# Altium PCB LED20-A1.PcbDoc
Units mm, origin at the board's own origin, x right, y up, seen from the top; angles counter-clockwise.
Board outline 69 x 44.5 mm, 2 copper layers (Top Layer, Bottom Layer); 79 components, 77 nets, 280 pads, 131 vias.
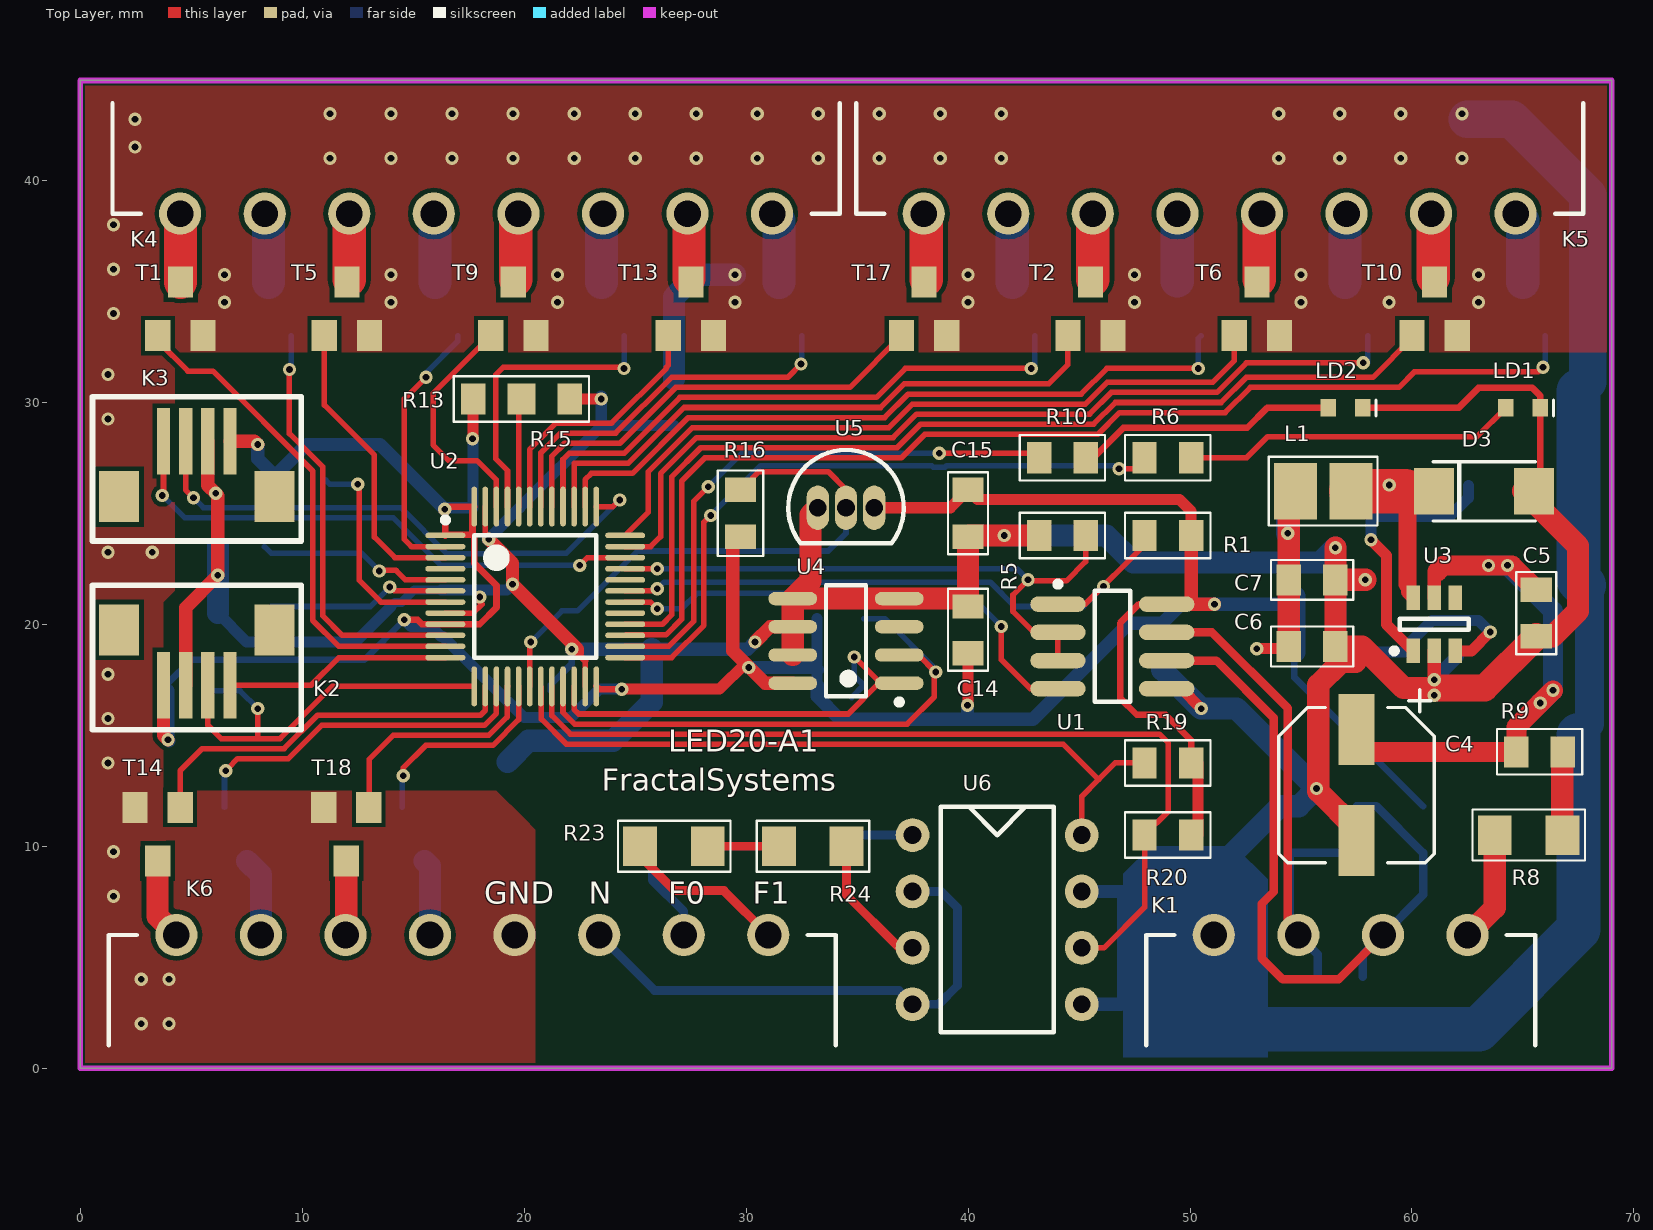
[diagram p0: Top Layer view]
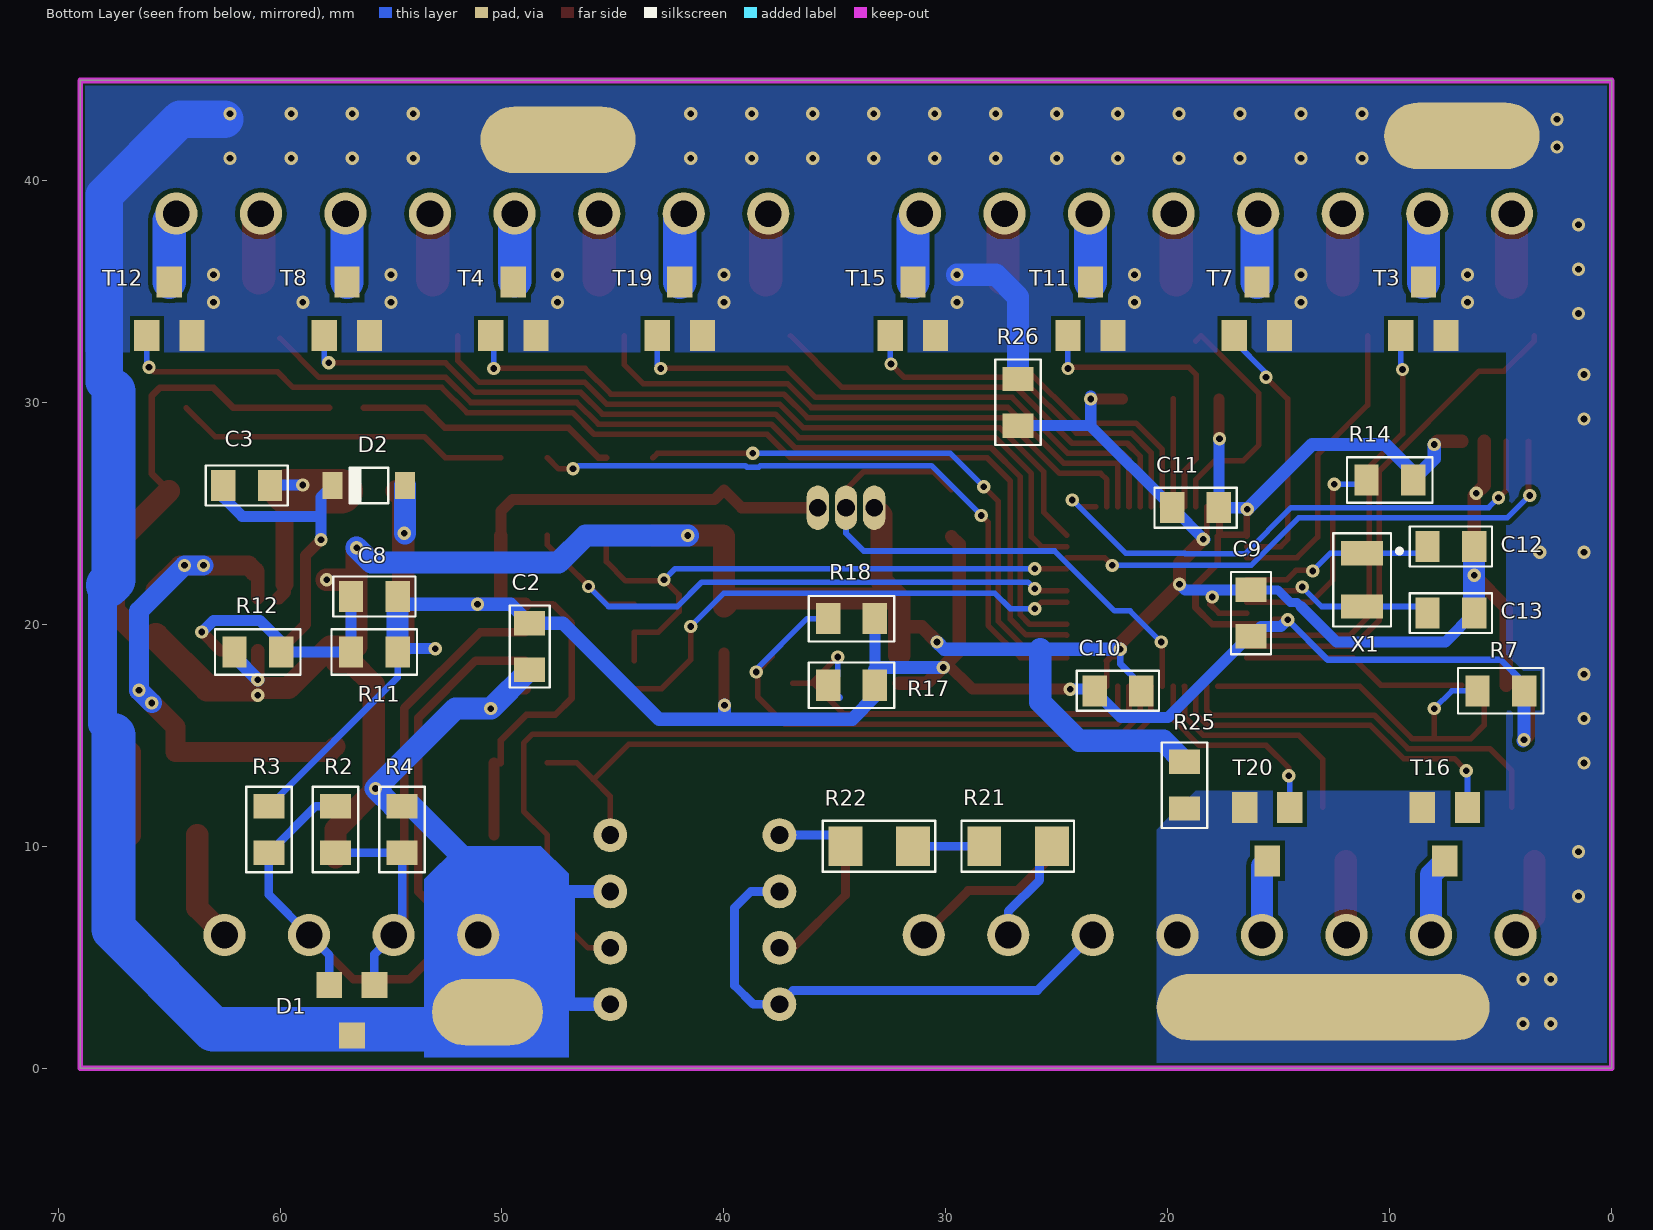
[diagram p1: Bottom Layer view, seen from below]

## Layer stack, top to bottom
Top Solder: solder mask 0.0102, Solder Resist, Dk 3.5
Top Layer: signal copper 0.0356
Dielectric 1: dielectric 0.32, FR-4, Dk 4.8
Bottom Layer: signal copper 0.0356
Bottom Solder: solder mask 0.0102, Solder Resist, Dk 3.5

## Board outline
0,0 69,0 69,44.5 0,44.5

## Design rules (kind name [scope] priority, off if disabled: settings)
Clearance ClearanceEdge [All vs OnLayer('Keep-Out Layer')] p1: gap=0.102
Clearance [All] p2: gap=0.203
DiffPairsRouting [All] p1: maxlimit=0.254 minlimit=0.254 mostfreqgap=0.254 toplayer_minwidth=0.381 toplayer_maxwidth=0.381 toplayer_prefwidth=0.381 bottomlayer_minwidth=0.381 bottomlayer_maxwidth=0.381 bottomlayer_prefwidth=0.381 maxuncoupledlength=12.7
HoleSize [All] p1: absolutevalues=TRUE maxlimit=6 minlimit=0.3 maxpercent=80.000 minpercent=20.000
HoleToHoleClearance [All] p1: gap=0.127 allowstackedmicrovias=TRUE
MinimumAnnularRing [All] p1: minimumring=0.13
MinimumSolderMaskSliver SilkscreenOverComponentPads [All] p2: minsoldermaskwidth=0.254
PolygonConnect [All] p1: connectstyle=Direct reliefconductorwidth=0.254 reliefentries=4 polygonreliefangle="90 Angle" airgapwidth=0.254
RoutingVias [All] p1: holewidth=0.3 width=0.6 viastyle="Through Hole" minholewidth=0.3 minwidth=0.6 maxholewidth=0.5 maxwidth=1
SilkToSilkClearance [All] p1: silktosilkclearance=0.15
SilkToSolderMaskClearance [IsPad] p1: minsilkscreentomaskgap=0.15 clearancetoexposedcopper=TRUE
SolderMaskExpansion [All] p1: expansion=0.1
UnpouredPolygon [All] p1: allowunpoured=FALSE
Width [All] p1: maxlimit=12.7 minlimit=0.203 preferedwidth=0.254
24 further rules are at their usual default settings.

## Classes and differential pairs
component class LED20-A1-P01: C2 C3 C4 C5 C6 C7 C8 C9 C10 C11 C12 C13 C14 C15 D1 D2 D3 K1 K2 K3 L1 LD1 LD2 R1 R2 R3 R4 R5 R6 R7 R8 R9 R10 R11 R12 R13 R14 R15 R16 R17 R18 R25 R26 U1 U2 U3 U4 U5 X1
component class LED20-A1-P02: K4 K5 K6 R19 R20 R21 R22 R23 R24 T1 T2 T3 T4 T5 T6 T7 T8 T9 T10 T11 T12 T13 T14 T15 T16 T17 T18 T19 T20 U6
differential pair RS485: +RS485_P -RS485_N

## Components (designator, comment, footprint, x,y, rotation, side; value= is the part's Value field where it differs from the comment)
C2 "1u" CC0805-1 48.75,19 r90 bottom
C3 "100n" CC0805-1 61.5,26.25 r0 bottom
C4 "10u" CAPPS-D6.3X7.7 57.5,12.75 r270 top
C5 "1u" CC0805-1 65.6,20.5 r90 top
C6 "10u" CC0805-1 55.5,19 r180 top
C7 "10u" CC0805-1 55.5,22 r180 top
C8 "DNI" CC0805-1 55.75,21.25 r180 bottom
C9 "100n" CC0805-1 16.25,20.5 r270 bottom
C10 "100n" CC0805-1 22.25,17 r0 bottom
C11 "100n" CC0805-1 18.75,25.25 r180 bottom
C12 "20p" CC0805-1 7.25,23.5 r0 bottom
C13 "20p" CC0805-1 7.25,20.5 r0 bottom
C14 "100n" CC0805-1 40,19.75 r270 top
C15 "100n" CC0805-1 40,25 r90 top
D1 "PESD12VL2BT" SOT-23_NUP2105L(Primary) 55.75,3.75 r270 bottom
D2 "1N4148" SOD-123 56,26.25 r180 bottom
D3 "SS110B" DO-214AC 63.25,26 r180 top
K1 "Terminal Block Connector, 3.81mm, Right Angle" CONN_3.81_4 62.5,6 r180 top
K2 "BM04B-SRSS-TB" JST-SH-4pin 5.25,19.75 r0 top locked
K3 "BM04B-SRSS-TB" JST-SH-4pin 5.25,25.75 r180 top
K4 "Terminal Block Connector, 3.81mm, Right Angle" CONN_3.81_8 4.5,38.5 r0 top
K5 "Terminal Block Connector, 3.81mm, Right Angle" CONN_3.81_8 38,38.5 r0 top
K6 "Terminal Block Connector, 3.81mm, Right Angle" CONN_3.81_8 31,6 r180 top
L1 "10uH" IND-LQH32CN4R7M33l 56,26 r180 top
LD1 "GREEN" LEDGREENC190 65,29.75 r180 top
LD2 "YELLOW" LEDYELLOWC190 57,29.75 r180 top
R1 "10K" RC0805-1 49,24 r0 top
R2 "DNI" RC0805-1 57.5,10.75 r270 bottom
R3 "47K" RC0805-1 60.5,10.75 r90 bottom
R4 "47K" RC0805-1 54.5,10.75 r270 bottom
R5 "10K" RC0805-1 44.25,24 r0 top
R6 "470R" RC0805-1 49,27.5 r0 top
R7 "10K" RC0805-1 5,17 r0 bottom
R8 "FUSE" RC1206-1 65.25,10.5 r0 top
R9 "10R" RC0805-1 65.75,14.25 r0 top
R10 "470R" RC0805-1 44.25,27.5 r0 top
R11 "31K6" RC0805-1 55.75,18.75 r180 bottom
R12 "10K" RC0805-1 61,18.75 r180 bottom
R13 "DNI" RC0805-1 18.75,30.15 r180 top
R14 "10K" RC0805-1 10,26.5 r0 bottom
R15 "10K" RC0805-1 21,30.15 r0 top
R16 "10K" RC0805-1 29.75,25 r90 top
R17 "10K" RC0805-1 34.25,17.25 r0 bottom
R18 "10K" RC0805-1 34.25,20.25 r0 bottom
R19 "10K" RC0805-1 49,13.75 r180 top
R20 "10K" RC0805-1 49,10.5 r180 top
R21 "120K" RC1206-1 26.75,10 r0 bottom
R22 "120K" RC1206-1 33,10 r0 bottom
R23 "120K" RC1206-1 26.75,10 r0 top
R24 "120K" RC1206-1 33,10 r0 top
R25 "0R" RC0805-1 19.25,12.75 r270 bottom
R26 "0R" RC0805-1 26.75,30 r270 bottom
T1 "PMV40UN" SOT-23 3.5,33 r90 top
T2 "PMV40UN" SOT-23 44.5,33 r90 top
T3 "PMV40UN" SOT-23 9.5,33 r90 bottom
T4 "PMV40UN" SOT-23 50.5,33 r90 bottom
T5 "PMV40UN" SOT-23 11,33 r90 top
T6 "PMV40UN" SOT-23 52,33 r90 top
T7 "PMV40UN" SOT-23 17,33 r90 bottom
T8 "PMV40UN" SOT-23 58,33 r90 bottom
T9 "PMV40UN" SOT-23 18.5,33 r90 top
T10 "PMV40UN" SOT-23 60,33 r90 top
T11 "PMV40UN" SOT-23 24.5,33 r90 bottom
T12 "PMV40UN" SOT-23 66,33 r90 bottom
T13 "PMV40UN" SOT-23 26.5,33 r90 top
T14 "PMV40UN" SOT-23 4.5,11.75 r270 top
T15 "PMV40UN" SOT-23 32.5,33 r90 bottom
T16 "PMV40UN" SOT-23 6.5,11.75 r270 bottom
T17 "PMV40UN" SOT-23 37,33 r90 top
T18 "PMV40UN" SOT-23 13,11.75 r270 top
T19 "PMV40UN" SOT-23 43,33 r90 bottom
T20 "PMV40UN" SOT-23 14.5,11.75 r270 bottom
U1 "SN65HVD08P" M08A_M 46.5,19 r0 top
U2 "STM32F030C8T6" STM-LQFP48_N 20.5,21.25 r0 top locked
U3 "MCP16331T-E/CH" MCHP-SOT-23-CH6_N 61,20 r90 top
U4 "LM75AIM" M08A_N 34.5,19.25 r180 top
U5 "DS18B20" TO92 34.5,25.25 r270 top
U6 "TLP620" DIP8 37.5,10.5 r0 top locked
X1 "8MHz" OSCCC150X320X9-2N 11.25,22 r270 bottom

## Footprints (in the part's own frame and the unit in brackets; to place one, negate y for a bottom-side part, rotate by r counter-clockwise, add the part's x,y. Pads: shape width x height; smd on the part's side, far side on the other; paste and mask are expansions set on the pad)
CAPPS-D6.3X7.7 [mm] "Capacitor polarised SMD D6.3; 6.6x6.6x7.7mm"
  rect 3.2x1.6 smd: 1(-2.5,0) 2(2.5,0)
  silkscreen extent -4.3,-3.5 3.5,3.5, body extent -3.3,-3.3 3.3,3.3, height 7.71
CC0805-1 [mm] "Chip capacitor  0805"
  rect 1.1x1.4 smd: 1(-1.05,0) 2(1.05,0)
  silkscreen extent -1.85,-0.9 1.85,0.9, body extent -1,-0.63 1,0.63, height 1
CONN_3.81_4 [mm]
  round 1.9 hole 1.2: 1(0,0) 2(3.81,0) 3(7.62,0) 4(11.43,0)
  silkscreen extent -3.05,0 14.48,0
CONN_3.81_8 [mm]
  round 1.9 hole 1.2: 1(0,0) 2(3.81,0) 3(7.62,0) 4(11.43,0) 5(15.24,0) 6(19.05,0) 7(22.86,0) 8(26.67,0)
  silkscreen extent -3.05,0 29.72,0
DIP8 [mil]
  round 60 hole 31.5: 1(0,0) 2(0,-100) 3(0,-200) 4(0,-300) 5(300,-300) 6(300,-200) 7(300,-100) 8(300,0)
  silkscreen extent 50,-350 250,50
DO-214AC [mm]
  rect 1.8x2.1 smd: A(-2.25,0) K(2.25,0)
  silkscreen extent -2.3,-1.33 2.3,1.35, body extent -2.3,-1.43 2.3,1.5, height 2.61
IND-LQH32CN4R7M33l [mm] "Inductor,Molded Body;3.20mm L X 2.50mm W X 2.20mm H"
  rect 1.95x2.55 smd: 1(-1.25,0) 2(1.25,0)
  silkscreen extent -2.45,-1.55 2.45,1.55, body extent -1.63,-1.28 1.63,1.28, height 2.2
JST-SH-4pin [mm]
  rect 1.8x2.3 smd: 0(3.5,0) ""(-3.5,0)
  rect 0.6x3 smd: 1(-1.5,-2.5) 2(-0.5,-2.5) 3(0.5,-2.5) 4(1.5,-2.5)
  silkscreen extent -4.7,-4.5 4.7,2
LEDGREENC190 [mm] "LED chip C190 1.6x0.8x0.8mm vertical"
  rect 0.7x0.8 smd: 1(-0.775,0) 2(0.775,0)
  silkscreen extent -1.38,-0.35 -1.38,0.35, body extent -0.8,-0.4 0.8,0.4, height 0.8
LEDYELLOWC190 [mm] "LED chip C190 1.6x0.8x0.8mm vertical"
  rect 0.7x0.8 smd: 1(-0.775,0) 2(0.775,0)
  silkscreen extent -1.38,-0.35 -1.38,0.35, body extent -0.8,-0.4 0.8,0.4, height 0.8
M08A_M [mm] "SOIC, 8-Leads, Body 4.9x3.9mm, Pitch 1.27mm, IPC Low Density"
  oval 2.5x0.7 smd: 1(-2.45,1.905) 2(-2.45,0.635) 3(-2.45,-0.635) 4(-2.45,-1.905) 5(2.45,-1.905) 6(2.45,-0.635) 7(2.45,0.635) 8(2.45,1.905)
  silkscreen extent -2.57,-2.5 0.8,2.93, body extent -2,-2.5 2,2.5, height 1.75
M08A_N [mm] "SOIC, 8-Leads, Body 4.9x3.9mm, Pitch 1.27mm, IPC Medium Density"
  oval 2.2x0.6 smd: 1(-2.4,1.905) 2(-2.4,0.635) 3(-2.4,-0.635) 4(-2.4,-1.905) 5(2.4,-1.905) 6(2.4,-0.635) 7(2.4,0.635) 8(2.4,1.905)
  silkscreen extent -2.53,-2.5 0.9,2.88, body extent -2,-2.5 2,2.5, height 1.75
MCHP-SOT-23-CH6_N [mm] "SOT23, 6-Leads, Body 2.9x1.55mm, Pitch 0.95mm, IPC Medium Density"
  rect 1.1x0.6 smd: 1(-1.2,0.95) 2(-1.2,0) 3(-1.2,-0.95) 4(1.2,-0.95) 5(1.2,0) 6(1.2,0.95)
  silkscreen extent -1.32,-1.55 0.25,1.92, body extent -0.9,-1.55 0.9,1.55, height 1.45
OSCCC150X320X9-2N [mm] "Oscillator, 1.5mm X 3.2m X 0.9mm"
  rect 1.1x1.9 smd mask+0.051: 1(-1.2,0) 2(1.2,0)
  silkscreen extent -2.1,-1.3 2.1,1.78, body extent -1.6,-0.8 1.5,0.8, height 2.5
RC0805-1 [mm] "Chip resistor 0805"
  rect 1.1x1.4 smd: 1(-1.05,0) 2(1.05,0)
  silkscreen extent -1.92,-1.02 1.92,1.02, body extent -1.02,-0.64 1.02,0.64, height 0.51
RC1206-1 [mil] "Chip resistor 1206"
  rect 60x70 smd: 1(-60,0) 2(60,0)
  silkscreen extent -99,-45 100,45, body extent -60,-30 60,30, height 22
SOD-123 [mm]
  rect 0.91x1.22 smd: 1(-1.637,0) 2(1.637,0)
  silkscreen extent -0.87,-0.8 0.87,0.8, body extent -1.93,-0.85 1.92,0.85, height 1.42
SOT-23 [mil]
  rect 55x45 smd: 1(0,0) 2(0,-80) 3(95,-40)
SOT-23_NUP2105L(Primary) [mil]
  rect 46x46 smd: A(0,0) b(0,-80) k(90,-40)
STM-LQFP48_N [mm] "QFP, 48-Leads, Body 7x7mm, Pitch 0.5mm, IPC Medium Density"
  oval 1.8x0.25 smd: 1(-4.05,2.75) 2(-4.05,2.25) 3(-4.05,1.75) 4(-4.05,1.25) 5(-4.05,0.75) 6(-4.05,0.25) 7(-4.05,-0.25) 8(-4.05,-0.75) 9(-4.05,-1.25) 10(-4.05,-1.75) 11(-4.05,-2.25) 12(-4.05,-2.75) 25(4.05,-2.75) 26(4.05,-2.25) 27(4.05,-1.75) 28(4.05,-1.25) 29(4.05,-0.75) 30(4.05,-0.25) 31(4.05,0.25) 32(4.05,0.75) 33(4.05,1.25) 34(4.05,1.75) 35(4.05,2.25) 36(4.05,2.75)
  oval 0.25x1.8 smd: 13(-2.75,-4.05) 14(-2.25,-4.05) 15(-1.75,-4.05) 16(-1.25,-4.05) 17(-0.75,-4.05) 18(-0.25,-4.05) 19(0.25,-4.05) 20(0.75,-4.05) 21(1.25,-4.05) 22(1.75,-4.05) 23(2.25,-4.05) 24(2.75,-4.05) 37(2.75,4.05) 38(2.25,4.05) 39(1.75,4.05) 40(1.25,4.05) 41(0.75,4.05) 42(0.25,4.05) 43(-0.25,4.05) 44(-0.75,4.05) 45(-1.25,4.05) 46(-1.75,4.05) 47(-2.25,4.05) 48(-2.75,4.05)
  silkscreen extent -4.17,-2.75 2.75,3.57, body extent -3.5,-3.5 3.5,3.5, height 1.6
TO92 [mm] "TO92"
  oval 2x1 hole 0.8: 1(0,-1.27) 2(0,0) 3(0,1.27)
  silkscreen extent -2.6,-2.6 1.6,2.6, body extent -2.61,-2.61 1.6,2.61, height 5.33

## Part data
C2 C3 C5 C8: library part CAPCC0805_1U50VX7R, "Capacitor chip ceramic 0805"
C4: library part CAPPS100U25VFP, "Capacitor electrolitic SMD 6.3X6.3X7.7MM low ESR"
C6 C7: library part CAPCC0805_10U16VX5R, "Capacitor chip ceramic 0805"
C9 C10 C11 C12 C13 C14 C15: library part CAPCC0805_100N50VX7R, "Capacitor chip ceramic 0805"
D1: library part NUP2105L, "Diode"
D2: library part D-1N4148WS, "Small Signal Diode"
D3: library part CD214A-B240LF-0.3V@1A, "Schottky Diode"
K1: library part CONN_TB_3.81_4PIN, "Terminal Block Connector, 3.81mm, 4pin"
K2 K3: library part JST-SH-BM04B-SRSS-TB, "JST connector 4pin vertical"
K4 K5 K6: library part CONN_TB_3.81_8PIN, "Terminal Block Connector, 3.81mm, 8pin"
L1: library part LQH44PN100MP0L, "Chip Inductor 4 x 4 mm"
LD1: library part LED-GREEN0603V, "LED green HSMG vertical"
LD2: library part LED-YELLOW0603V, "LED yellow HSMY vertical"
R1 R2 R3 R4 R5 R6 R7 R9 R10 R11 R12 R13 R14 R15 R16 R17 R18 R19 R20 R25 R26: library part RES0805, "Chip Resistor 0805"
R8 R21 R22 R23 R24: library part RES1206, "Chip Resistor 1206"
U1: "3.3 / 5 V RS-485 Transceiver, 10 Mbps, Half Duplex, -40 to 85 degC, 8-pin PDIP (P), Pb-Free (RoHS)"
U2: "ARM Cortex-M0 32-bit MCU, 64 KB Flash, 8 KB Internal RAM, 39 I/Os, 48-pin LQFP, -40 to 85 degC, Tray"
U3: library part MCP16301T-E/CH, "High-Voltage Input Integrated Switch Step-Down Regulator, 600 mA, Input Voltage 4.0 to 30 V, Output Voltage 2.0 to 15 V, -40 to 125 degC, 6-pin SOT-23 (CH6), Tape and Reel"
U4: "Digital Temperature Sensor and Thermal Watchdog with Two-Wire Interface, 8-pin Narrow SOIC"
U5 U6: "digital temperature sensor"
X1: library part XTAL-SMD_8MHz, "SMD Crystal 8MHz"

## Free pads (board coordinates)
  oval 7x3 smd far side: 0(6.75,42) 0(47.475,41.825)
  oval 15x3 smd far side: 0(13,2.75)
  oval 5x3 smd far side: 0(50.65,2.525)

## Via types
v1: diameter 0.6, hole 0.3, Top Layer to Bottom Layer, tented both sides, 130 vias
v2: diameter 0.6, hole 0.3, Top Layer to Bottom Layer, 1 vias

## Nets (pads, with @x,y where several pads share a name; then routed paths per layer and width w, separated by ;. In a path a pad name is that pad's centre, name@x,y a point inside that pad or via, vN(x,y) a via of type N, cw(c..) or ccw(c..) an arc to the next point about the centre after c; other vN are vias at no path point)
+3V3: C2.2 C6.2 C7.2 C8.2 C9.2 C10.2 C11.2 C14.2 C15.2 D2.2 K2.1 K3.1 L1.2 R1.2 R3.2 R7.1 R11.2 R13.2 R14.1 R16.1 R17.1 R18.1 R19.1 R20.1 U1.8 U2.1 U2.9 U2.24 U2.48 U4.8 U5.3 | length 170.7
  Top Layer w0.3: v1(14.6,20.2) 15.2,20.2 15.4,20 U2.9 18,20 18.753,20.753 18.753,21.747 17.747,22.753 17.747,23.953 17.675,24.025 ; U2.1 U2.1@16.45,24.003 ; U2.48 U2.48@17.747,25.3 ; U2.24 23.375,17.075 v1@24.35,17.075 ; U1.8 47.705,20.905 46.85,20.05 46.85,16.675 47.6,15.925 48.9,15.925 50.05,14.775 R19.1 ; U2.1@16.45,24.003 16.45,25.15 v1(16.425,25.175) 16.55,25.3 U2.48@17.747,25.3 ; U2.1@16.45,24.003 16.472,24.025 17.675,24.025 ; 17.675,24.025 17.675,25.228 U2.48@17.747,25.3
  Top Layer w0.5: v1(17.675,28.35) 17.7,28.375 R13.2 ; v1(24.4,17.075) 28.8,17.075 v1@29.963,18.237 ; U5.3 39.2,25.25 C15.2 40.425,25.625 49.525,25.625 50.05,25.1 R1.2 ; v1@39.975,16.425 40,16.4 C14.2 ; R20.1@50.35,10.5 R19.1@50.35,13.75 ; v2(53,18.9) 54.35,18.9 C6.2
  Top Layer w0.6: K2.1 3.75,15 v1(3.95,14.8) ; K3.1 7.85,28.25 v1(8,28.1) ; R16.1 29.4,23.6 29.4,18.8 29.963,18.237 30.855,17.345 U4.8 ; U1.8 U1.8@49.905,20.905 ; R1.2 50.05,21.05 U1.8@49.905,20.905 ; v1(51.1,20.9) 51.095,20.905 U1.8@49.905,20.905
  Top Layer w1: C6.2 54.45,25.7 L1.2
  Bottom Layer w0.3: R7.1@3.95,17.35 5,18.4 12.8,18.4 v1(14.6,20.2) ; R11.2 54.7,17.6 R3.2
  Bottom Layer w0.5: v1(14.6,20.2) 14.9,19.9 15.8,19.9 C9.2 16.35,19.45 20,15.8 22.1,15.8 C10.2 23.375,17.075 v1(24.4,17.075) ; v1(16.425,25.175) 16.5,25.25 C11.2 v1@17.7,28.375 ; R17.1 33.2,17.95 R18.1 ; v2(53,18.9) 54.55,18.9 R11.2
  Bottom Layer w0.6: R7.1 v1(3.95,14.8) v1@4,14.75 ; v1(8,28.1) 8,27.45 R14.1 8.95,26.85 10.2,28.1 13.5,28.1 v1(16.425,25.175) ; v1(30.125,18.05) 33.1,18.05 33.2,17.95 ; R17.1 33.2,16.75 34.225,15.725 39.975,15.725 ; v1(39.975,16.35) 39.975,15.725 ; C8.2 54.35,20.9 v1(51.1,20.9) 49.6,20.9 C2.2 47.25,20.05 42.925,15.725 39.975,15.725
  Bottom Layer w1: v1@54.362,24.1 D2.2 ; R11.2 C8.2
  other v1: 54.4,24.1
+VCC: K1.1 R8.1 | length 5
  Top Layer w1: K1.1 63.726,7.226 R8.1
GND: C2.1 C4.2 C5.1 C6.1 C7.1 C9.1 C10.1 C11.1 C12.1 C13.1 C14.1 C15.1 D1.k D3.A K1.4 K2.2 K3.2 K6.4 LD1.1 LD2.1 pad.0 R4.1 R5.1 R12.1 R15.2 R25.1 R25.2 R26.1 R26.2 T1.2 T2.2 T3.2 T4.2 T5.2 T6.2 T7.2 T8.2 T9.2 T10.2 T11.2 T12.2 T13.2 T14.2 T15.2 T16.2 T17.2 T18.2 T19.2 T20.2 U1.5 U2.8 U2.23 U2.47 U3.2 U4.4 U4.5 U4.6 U4.7 U5.1 U6.5 U6.7 | length 274.1
  Top Layer w0.25: U2.8 17.7,20.5 18.1,20.9 18,21 v1(18,21.225) ; v1@18.25,23.9 U2.47 ; U2.23 22.75,18.35
  Top Layer w0.3: v1@18.25,23.9 18.324,23.826 v1@18.326,23.826 ; v1(22.15,18.875) 22.225,18.875 22.387,18.713 22.75,18.35 ; LD2.1 62.1,29.75 63,30.65 65.425,30.65 65.775,30.3 LD1.1 65.775,26.775 D3.A@65,26
  Top Layer w0.5: R15.2 v1(23.475,30.15) ; U1.5 49.605,17.095 v1(50.5,16.2)
  Top Layer w0.6: K2.2 4.75,20.75 v1(6.2,22.2) 6.2,25.8 v1(6.1,25.9) 5.75,26.25 K3.2 ; v1(18.4,23.826) 19.475,22.751 v1(19.475,21.8) 22.387,18.888 v1@22.387,18.713 ; v1(30.4,19.2) 31.085,19.885 U4.6 ; U3.2 v1(61,17.5) 61,17.25 61.125,17.125
  Top Layer w1: U4.7 U4.6 U4.5 ; U5.1 32.9,24.92 32.9,21.955 U4.5 ; R5.1 40.05,24 C15.1 C14.1 39.645,21.155 U4.4 U4.5 ; v1(56.55,23.45) C7.1 ; 57.45,18.3 56.8,18.3 55.774,17.274 55.774,12.476 57.5,10.75 C4.2@57.5,9.5 ; v1(57.9,22) C7.1 ; 61.125,17.125 59.625,17.125 57.75,19 C6.1 C7.1 ; D3.A@65,26 67.475,23.525 67.475,20.6 66.325,19.45 C5.1
  Top Layer w1.2: 61.125,17.125 63.275,17.125 C5.1
  Bottom Layer w0.3: C10.1 21.2,17.275 22.15,18.225 v1(22.15,18.875) ; pad.0@50.65,2.525 51.336,1.839 D1.k@56.766,1.839
  Bottom Layer w0.4: 14,20.8 14.172,20.972 14.472,20.972 15.05,21.55 C9.1
  Bottom Layer w0.5: C13.1 7.5,19.2 12.4,19.2 14,20.8 ; C9.1 17.85,21.55 ; v1(18,21.225) 18,21.4 17.85,21.55 ; v1@18.326,23.826 18.326,23.824 18.35,23.8 C11.1 23.475,28.925 ; v1(19.475,21.8) 19.225,21.55 17.85,21.55 ; v1@23.475,30.275 v1(23.475,30.15) 23.475,28.925 ; R26.2 23.5,28.95 23.475,28.925
  Bottom Layer w0.6: v1(22.15,18.875) 25.75,18.875 30.075,18.875 v1(30.4,19.2) ; U6.5 46.88,2.88 47,3 47,7.96 U6.7 ; 47.05,5.95 47.1,6 K1.4 ; v1(61,17.5) 62.05,18.55 R12.1
  Bottom Layer w1: C13.1 v1(6.2,22.2) C12.1 ; R25.1 20.2,14.75 24,14.75 25.75,16.5 25.75,18.875 ; R26.1 26.75,34.75 27.75,35.75 v1(29.5,35.75) ; v1(41.625,24) 46.225,24 47.45,22.775 55.875,22.775 v1(56.55,23.45) ; C2.1 v1(50.5,16.2) 52.1,16.2 v1(55.7,12.6) 54.9,11.8 R4.1 54.05,11.8 51.5,9.25
  Bottom Layer w1.3: 67.5,15 68,15.5 68,21.5 67.75,21.75
  Bottom Layer w1.7: 62.5,42.75 64.5,42.75 67.921,39.329 67.921,30.921 67.5,30.5
  Bottom Layer w2: K1.4 50.65,5.58 50.65,2.525 52.314,2.525 53.089,1.75 63,1.75 67.5,6.25 67.5,15 ; 67.5,30.5 67.5,22 67.75,21.75
  other v1: 2.75,2 4,2 2.75,4 4,4 1.5,7.75 1.5,9.75 1.25,13.75 1.25,15.75 61,16.8 1.25,17.75 1.25,23.25 3.25,23.25 1.25,29.25 1.25,31.25 1.5,34 6.5,34.5 14,34.5 21.5,34.5 29.5,34.5 40,34.5 47.5,34.5 55,34.5 58.968,34.5 63,34.5 6.5,35.75 14,35.75 21.5,35.75 40,35.75 47.5,35.75 55,35.75 63,35.75 1.5,36 1.5,38 11.25,41 14,41 16.75,41 19.5,41 22.25,41 25,41 27.75,41 30.5,41 33.25,41 36,41 38.75,41 41.5,41 54,41 56.75,41 59.5,41 62.25,41 2.468,41.5 2.468,42.75 11.25,43 14,43 16.75,43 19.5,43 22.25,43 25,43 27.75,43 30.5,43 33.25,43 36,43 38.75,43 41.5,43 54,43 56.75,43 59.5,43 62.25,43
I2C_CLK: R18.2 U2.21 U4.2 | length 25
  Top Layer w0.25: U2.21 21.75,16.025 22.272,15.503 37.253,15.503 38.475,16.725 38.475,17.9 U4.2@37.825,18.55
  Bottom Layer w0.25: R18.2 36.25,20.25 38.55,17.95 v1(38.55,17.85)
I2C_DAT: R17.2 U2.22 U4.1 | length 20.2
  Top Layer w0.25: U2.22 22.25,16.166 22.46,15.956 34.6,15.956 35.989,17.345 U4.1@36.055,17.345 ; v1(34.875,18.525) U4.1@36.055,17.345 ; U4.1 U4.1@36.055,17.345
  Bottom Layer w0.25: 34.75,16.7 R17.2 34.875,17.675 v1(34.875,18.525)
IN0: K6.2 R21.1 | length 4.8
  Bottom Layer w0.4: R21.1 25.775,9.451 25.775,8.475 27.19,7.06 K6.2
IN1: K6.1 R23.1 | length 7.7
  Top Layer w0.4: R23.1 25.226,9.549 26.775,8 29,8 K6.1
INP0: R19.2 U2.19 U6.8 | length 32.9
  Top Layer w0.25: U2.19 20.772,17.178 20.772,15.721 21.896,14.597 44.278,14.597 45.875,13 ; U6.8 45.12,12.245 45.875,13 ; R19.2 46.625,13.75 45.875,13
INP1: R20.2 U2.20 U6.6 | length 41
  Top Layer w0.25: U2.20 21.25,15.884 22.084,15.05 48.625,15.05 49.025,14.65 49.025,11.575 R20.2 47.95,7.25 46.12,5.42 U6.6
LED1: R6.1 U2.25 | length 29.9
  Top Layer w0.25: U2.25 26.648,18.5 28.1,19.952 28.1,24.6 v1(28.4,24.9) ; v1(46.8,27) 47.45,27 R6.1
  Bottom Layer w0.25: v1(28.4,24.9) 30.65,27.15 38.362,27.15 38.44,27.072 38.96,27.072 39.038,27.15 46.55,27.15 v1@46.7,27
LED2: R10.1 U2.26 | length 25.5
  Top Layer w0.25: U2.26 26.507,19 27.647,20.14 27.647,25.547 v1(28.3,26.2) ; v1(38.7,27.7) 43,27.7 R10.1
  Bottom Layer w0.25: v1(28.3,26.2) 29.8,27.7 v1(38.7,27.7)
N: K6.3 U6.2 U6.4 | length 23.6
  Bottom Layer w0.4: K6.3 25.88,3.5 36.88,3.5 U6.4 38.68,2.88 39.525,3.725 39.525,7.225 38.79,7.96 U6.2
NetC3_1: C3.1 D3.K L1.1 U3.6 | length 9.7
  Top Layer w0.6: 59.8,21.8 59.8,21.45 U3.6
  Top Layer w0.8: 59.7,26 D3.K@60.1,25.6 ; 59.8,21.8 59.8,25.3 D3.K@60.1,25.6 ; D3.K@60.5,26 D3.K@60.1,25.6
  Top Layer w2: L1.1 59.7,26
  Bottom Layer w0.5: v1(58.975,26.275) 60.425,26.275 C3.1
NetC3_2: C3.2 D2.1 U3.1 | length 13.7
  Top Layer w0.5: v1@58.175,23.775 58.853,23.097 58.853,19.997 U3.1
  Bottom Layer w0.5: D2.1 58.15,25.737 58.15,24.85 ; v1(58.15,23.8) 58.15,24.85 ; C3.2 62.55,25.7 61.7,24.85 58.15,24.85
NetC4_1: C4.1 C5.2 R9.1 U3.5 | length 25.2
  Top Layer w0.6: U3.5 61,22.225 61.15,22.375
  Top Layer w0.9: C4.1@57.5,14.5 57.75,14.25 R9.1 64.7,15.375 v1(65.775,16.45) v1(66.35,17.025) ; 61.15,22.375 61.425,22.65 v1(63.45,22.65) v1(64.3,22.65) 64.5,22.65 C5.2
  Bottom Layer w0.9: v1(63.45,22.65) v1(64.3,22.65) 66.35,20.6 v1(66.35,17.025) v1(65.775,16.45)
NetC8_1: C8.1 R11.1 R12.2 U3.3 | length 12.2
  Top Layer w0.5: U3.3 62.675,18.8 v1(63.525,19.65)
  Bottom Layer w0.5: C8.1 R11.1 R12.2 59.95,19.225 60.9,20.175 63,20.175 v1(63.525,19.65)
NetC12_2: C12.2 U2.5 X1.1 | length 8.7
  Top Layer w0.25: v1@13.525,22.425 14.225,22.425 14.65,22 U2.5
  Bottom Layer w0.25: C12.2 8.6,23.2 X1.1 12.675,23.2 v1(13.475,22.4)
NetC13_2: C13.2 U2.6 X1.2 | length 8.7
  Top Layer w0.25: v1@13.975,21.675 14.15,21.5 U2.6
  Bottom Layer w0.25: C13.2 8.6,20.8 X1.2 13.075,20.8 v1(13.95,21.675)
NetLD1_2: LD1.2 R6.2 | length 15.1
  Top Layer w0.25: R6.2 52.55,27.5 53.5,28.45 62.925,28.45 LD1.2
NetLD2_2: LD2.2 R10.2 | length 11.9
  Top Layer w0.3: R10.2 45.65,27.5 47,28.85 52.575,28.85 53.475,29.75 LD2.2
NetR8_2: R8.2 R9.2 | length 3.8
  Top Layer w1: R8.2 66.774,14.224 R9.2
NetR13_1: R13.1 R15.1 U2.44 | length 4.9
  Top Layer w0.25: U2.44 R13.1@19.75,30.15
NetR14_2: R14.2 U2.7 | length 10.1
  Top Layer w0.25: v1@12.575,26.275 12.575,21.975 13.55,21 U2.7
  Bottom Layer w0.25: R14.2 11.25,26.3 v1(12.5,26.3)
NetR21_2: R21.2 R22.1 | length 3.2
  Bottom Layer w0.4: R21.2 R22.1
NetR22_2: R22.2 U6.1 | length 3.2
  Bottom Layer w0.4: R22.2 35.024,10.5 U6.1
NetR23_2: R23.2 R24.1 | length 3.2
  Top Layer w0.4: R23.2 R24.1
NetR24_2: R24.2 U6.3 | length 6.2
  Top Layer w0.4: R24.2 34.524,7.801 36.905,5.42 U6.3
ONEW: R16.2 U2.18 U5.2 | length 25.6
  Top Layer w0.25: U2.18 20.25,19.15 v1(20.3,19.2) ; R16.2 30.575,26.875 33.7,26.875 34.5,26.075 U5.2
  Bottom Layer w0.25: v1(20.3,19.2) 21.7,20.6 22.4,20.6 25.1,23.3 33.7,23.3 34.5,24.1 U5.2
OUT0: K4.1 T1.3 | length 3.1
  Top Layer w1: K4.1 K4.1@4.516,38.484
  Top Layer w1.5: T1.3 K4.1@4.516,38.484
OUT1: K4.2 T3.3 | length 3.2
  Bottom Layer w1: K4.2 K4.2@8.484,38.326
  Bottom Layer w1.5: T3.3 K4.2@8.484,38.326
OUT2: K4.3 T5.3 | length 3.1
  Top Layer w1: T5.3 T5.3@12.12,35.517
  Top Layer w1.5: T5.3@12.12,35.517 K4.3
OUT3: K4.4 T7.3 | length 3.1
  Bottom Layer w1: K4.4 K4.4@15.984,38.446
  Bottom Layer w1.5: T7.3 K4.4@15.984,38.446
OUT4: K4.5 T9.3 | length 3
  Top Layer w1.5: T9.3@19.62,35.517 K4.5@19.62,38.5
OUT5: K4.6 T11.3 | length 3.1
  Bottom Layer w1: K4.6@23.484,38.434 K4.6
  Bottom Layer w1.5: T11.3 K4.6@23.484,38.434
OUT6: K4.7 T13.3 | length 3
  Top Layer w1.5: T13.3@27.429,35.579 K4.7@27.429,38.562
OUT7: K4.8 T15.3 | length 3.2
  Bottom Layer w1: K4.8 K4.8@31.484,38.186
  Bottom Layer w1.5: T15.3 K4.8@31.484,38.186
OUT8: K5.1 T17.3 | length 3
  Top Layer w1.5: T17.3@38.12,35.517 K5.1@38.12,38.5
OUT9: K5.2 T19.3 | length 3.2
  Bottom Layer w1: K5.2 K5.2@41.984,38.326
  Bottom Layer w1.5: T19.3 K5.2@41.984,38.326
OUT10: K5.3 T2.3 | length 3
  Top Layer w1.5: T2.3@45.62,35.517 K5.3
OUT11: K5.4 T4.3 | length 3.1
  Bottom Layer w1: T4.3@49.43,35.467 T4.3
  Bottom Layer w1.5: T4.3@49.43,35.467 K5.4
OUT12: K5.5 T6.3 | length 3
  Top Layer w1.5: T6.3@53.12,35.517 K5.5@53.12,38.5
OUT13: K5.6 T8.3 | length 3.1
  Bottom Layer w1: K5.6@56.984,38.434 K5.6
  Bottom Layer w1.5: T8.3 K5.6@56.984,38.434
OUT14: K5.7 T10.3 | length 3
  Top Layer w1.5: T10.3@60.954,35.604 K5.7@60.954,38.587
OUT15: K5.8 T12.3 | length 3.2
  Bottom Layer w1: K5.8 K5.8@64.984,38.186
  Bottom Layer w1.5: T12.3 K5.8@64.984,38.186
OUT16: K6.8 T14.3 | length 3.7
  Top Layer w1: T14.3 3.484,6.846 K6.8
OUT17: K6.7 T16.3 | length 3.6
  Bottom Layer w1: T16.3 8.14,8.713 K6.7
OUT18: K6.6 T18.3 | length 3.4
  Top Layer w1: K6.6 11.984,6.034 T18.3
OUT19: K6.5 T20.3 | length 3.4
  Bottom Layer w1: T20.3 15.76,9.093 K6.5
OUT_GATE_0: T1.1 U2.11 | length 22.8
  Top Layer w0.25: T1.1 3.5,32.75 4.85,31.4 5.975,31.4 10.475,26.9 10.475,20.175 11.65,19 U2.11
OUT_GATE_1: T3.1 U2.10 | length 19.2
  Top Layer w0.25: v1(9.425,31.475) 9.425,28.591 10.928,27.088 10.928,20.375 11.803,19.5 U2.10
  Bottom Layer w0.25: v1(9.425,31.475) 9.5,31.55 T3.1
OUT_GATE_2: T5.1 U2.3 | length 13.6
  Top Layer w0.25: T5.1 11,29.875 13.25,27.625 13.25,23.925 14.175,23 U2.3
OUT_GATE_3: T7.1 U2.2 | length 12.2
  Top Layer w0.25: v1(15.575,31.125) 14.6,30.15 14.6,23.825 14.925,23.5 U2.2
  Bottom Layer w0.25: v1(15.575,31.125) 15.575,31.325 17,32.75 T7.1
OUT_GATE_4: T9.1 U2.46 | length 11.1
  Top Layer w0.25: U2.46 18.75,26.5 17.875,27.375 16.6,27.375 15.9,28.075 15.9,30.4 T9.1 T9.1@18.75,32.75
OUT_GATE_5: T11.1 U2.45 | length 13.6
  Top Layer w0.25: U2.45 19.25,26.925 18.725,27.45 18.725,31.25 19.05,31.575 24.45,31.575 v1(24.5,31.525)
  Bottom Layer w0.25: v1(24.5,31.525) T11.1
OUT_GATE_6: T13.1 U2.43 | length 11.7
  Top Layer w0.25: U2.43 20.25,27.866 21.444,29.06 23.935,29.06 26.403,31.528 26.403,31.578 26.5,31.675 T13.1
OUT_GATE_7: T15.1 U2.42 | length 17.1
  Top Layer w0.25: U2.42 20.75,27.725 21.631,28.606 24.125,28.606 26.643,31.125 31.875,31.125 v1(32.475,31.725)
  Bottom Layer w0.25: v1(32.475,31.725) 32.5,31.75 T15.1
OUT_GATE_8: T17.1 U2.41 | length 20.3
  Top Layer w0.25: U2.41 21.25,27.575 21.828,28.153 24.312,28.153 26.831,30.672 34.672,30.672 T17.1
OUT_GATE_9: T19.1 U2.40 | length 26.5
  Top Layer w0.25: U2.40 21.75,27.425 22.025,27.7 24.5,27.7 27.019,30.219 35.869,30.219 37.175,31.525 v1(42.85,31.525) v1@42.875,31.55
  Bottom Layer w0.25: v1(42.85,31.525) 43,31.675 T19.1
OUT_GATE_10: T2.1 U2.39 | length 27.3
  Top Layer w0.25: U2.39 22.25,27.247 24.688,27.247 27.206,29.765 36.056,29.765 37.116,30.825 43.625,30.825 44.5,31.7 T2.1
OUT_GATE_11: T4.1 U2.38 | length 32.4
  Top Layer w0.25: U2.38 22.75,26.519 23.025,26.794 24.875,26.794 27.394,29.312 36.244,29.312 37.304,30.372 45.097,30.372 46.25,31.525 v1(50.375,31.525)
  Bottom Layer w0.25: v1(50.375,31.525) 50.375,32.875 T4.1
OUT_GATE_12: T6.1 U2.36 | length 32.9
  Top Layer w0.25: U2.36 25.6,25.05 25.6,26.877 27.582,28.859 36.432,28.859 37.491,29.919 45.285,29.919 46.263,30.897 51.022,30.897 52,31.875 T6.1
OUT_GATE_13: T8.1 U2.35 | length 39.8
  Top Layer w0.25: U2.35 25.7,23.5 26.15,23.95 26.15,26.786 27.769,28.406 36.619,28.406 37.679,29.465 45.472,29.465 46.45,30.444 51.21,30.444 52.541,31.775 v1(57.8,31.775)
  Bottom Layer w0.25: v1(57.8,31.775) 58,31.775 T8.1
OUT_GATE_14: T10.1 U2.28 | length 44.4
  Top Layer w0.25: U2.28 26.225,20 26.647,20.422 26.647,26.642 27.957,27.953 36.807,27.953 37.867,29.012 45.66,29.012 46.638,29.99 51.397,29.99 52.532,31.125 58.238,31.125 T10.1@60,32.887
OUT_GATE_15: T12.1 U2.27 | length 51.5
  Top Layer w0.25: U2.27 24.572,19.522 26.388,19.522 27.1,20.234 27.1,26.454 28.145,27.499 36.995,27.499 38.055,28.559 45.848,28.559 46.826,29.537 51.585,29.537 52.72,30.672 59.406,30.672 60.109,31.375 65.7,31.375 v1(65.9,31.575)
  Bottom Layer w0.25: v1(65.9,31.575) 66,31.675 T12.1
OUT_GATE_16: T14.1 U2.14 | length 17.6
  Top Layer w0.25: T14.1 4.5,13.4 5.497,14.397 9.188,14.397 10.691,15.9 18.025,15.9 18.25,16.125 U2.14
OUT_GATE_17: T16.1 U2.15 | length 16
  Top Layer w0.25: v1@6.65,13.5 7.094,13.944 9.375,13.944 10.879,15.447 18.213,15.447 18.75,15.984 U2.15
  Bottom Layer w0.25: T16.1 6.5,13.35 v1(6.55,13.4)
OUT_GATE_18: T18.1 U2.16 | length 10.6
  Top Layer w0.25: T18.1@13.025,11.75 13.025,13.925 14.094,14.994 18.4,14.994 19.228,15.821 19.228,17.178 U2.16
OUT_GATE_19: T20.1 U2.17 | length 9.4
  Top Layer w0.25: v1(14.55,13.175) 14.55,13.525 15.565,14.54 18.588,14.54 19.75,15.702 U2.17
  Bottom Layer w0.25: T20.1 14.5,13.125 v1(14.55,13.175)
RS485_N: D1.A K1.3 R2.2 R4.2 U1.7 | length 26.4
  Top Layer w0.381: U1.7 50.99,19.635 54.4,16.225 54.4,6.48 K1.3
  Bottom Layer w0.381: D1.A@55.75,4.125 55.75,5.13 K1.3 54.5,6.38 R4.2 R2.2
RS485_P: D1.b K1.2 R2.1 R3.1 U1.6 | length 34.2
  Top Layer w0.381: U1.6 51.185,18.365 53.765,15.785 53.765,7.94 53.225,7.4 53.225,4.95 54.175,4 56.69,4 K1.2
  Bottom Layer w0.381: R2.1 58.4,11.8 R3.1 60.5,7.81 K1.2 57.782,5.092 D1.b@57.782,4.125
RS485_RX: R1.1 U1.1 U2.31 | length 28
  Top Layer w0.25: U2.31 25.9,21.5 v1(26,21.6) ; U1.1 45.28,20.905 47.95,23.575 R1.1
  Bottom Layer w0.25: v1(26,21.6) 26.3,21.9 41,21.9 42.1,20.8 45.2,20.8 v1(46.1,21.7)
RS485_TX: U1.4 U2.30 | length 22.4
  Top Layer w0.25: U2.30 25.7,21 v1@25.9,20.8 ; v1(41.5,19.9) 41.5,18.4 42.805,17.095 U1.4
  Bottom Layer w0.25: v1(26,20.7) 27.1,20.7 27.8,21.4 40,21.4 v1(41.5,19.9)
SWCLK: K3.3 U2.37 | length 25.1
  Top Layer w0.25: K3.3 4.75,26.05 v1(5.1,25.7) ; U2.37 24,25.3 v1(24.3,25.6)
  Bottom Layer w0.25: v1(5.1,25.7) 5.547,25.253 14.447,25.253 16.528,23.172 18.583,23.172 18.587,23.175 19.213,23.175 19.238,23.2 21.9,23.2 v1(24.3,25.6)
SWDIO: K3.4 U2.34 | length 24.8
  Top Layer w0.25: v1(3.7,25.8) 3.75,25.85 K3.4 ; v1(22.5,22.65) 22.85,23 U2.34
  Bottom Layer w0.25: v1(3.7,25.8) 4.7,24.8 14.1,24.8 16.25,22.65 v1(22.5,22.65)
TX_EN: R5.2 U1.2 U1.3 U2.33 | length 27.9
  Top Layer w0.25: U2.33 v1(26,22.5) ; U1.3 U1.2 42.965,19.635 42.025,20.575 42.025,21.325 42.65,21.95 44.425,21.95 45.3,22.825 R5.2
  Bottom Layer w0.25: v1(26,22.5) 42.2,22.5 v1(42.7,22)
UART_RX: K2.3 R7.2 U2.13 | length 18.7
  Top Layer w0.25: K2.3 5.75,15.45 6.35,14.85 8,14.85 ; v1(8,16.2) 8,14.85 ; U2.13 15.35,17.2 11.35,17.2 9,14.85 8,14.85
  Bottom Layer w0.25: R7.2 7.2,17 v1(8,16.2)
UART_TX: K2.4 U2.12 | length 10.2
  Top Layer w0.25: K2.4 10.4,17.25 11.65,18.5 U2.12
pads on no net: K2. K2.0 K3. K3.0 U2.4 U2.29 U2.32 U3.4 U4.3

## Polygon pours and split planes (outlines as drawn)
GND on Top Layer "TOP2-GND" (solid, pour order 19): 0,10 0,44.5 2,44.5 5,41.5 4.25,40.75 4.25,28 4.25,21.5 4,21.25 3.75,21 3.75,17.75 3.75,10.5 4.25,10
GND on Top Layer "TOP-GND" (solid, pour order 13): 0,12.5 17.75,12.5 18.75,12.5 20,11.25 20.5,10.75 20.5,5.5 20.5,0 0,0
GND on Top Layer "TOP-GND" (solid, pour order 11): 0,44.5 69,44.5 69,32.25 55.75,32.25 0,32.25
GND on Bottom Layer "BOT-GND" (solid, pour order 10): 0,44.5 69,44.5 69,32.25 55.75,32.25 0,32.25
GND on Bottom Layer "BOT2-GND" (solid, pour order 16): 0,5 0,44.5 1.75,44.5 6,40.25 4.75,39 4.75,22.75 4.75,7.5 5.5,6.75
GND on Bottom Layer "BOT-GND" (solid, pour order 12): 0,12.5 17.75,12.5 18.75,12.5 20,11.25 20.5,10.75 20.5,5.5 20.5,0 0,0

## Keep-outs
Keep-Out Layer:
  the board outline again, w0.254

## Other copper
Bottom Layer:
  region net GND: 53.5,0.5 53.5,8.5 52,10 48.25,10 47,8.75 47,0.5

## Silkscreen, mask and mechanical layers (free items; w line width, h text height)
Top Overlay:
  lines w0.2: 1.282,1.032 1.282,6 ; 1.452,38.5 1.452,43.468 ; 34.048,1.032 34.048,6 ; 34.218,38.5 34.218,43.468 ; 34.952,38.5 34.952,43.468 ; 48.022,1.032 48.022,6 ; 65.548,1.032 65.548,6 ; 67.718,38.5 67.718,43.468
  text "LED20-A1" at 26.5,14.25 h1
  text "FractalSystems" at 23.5,12.5 h1
  text "GND" at 18.2,7.4 h1
  text "N" at 22.9,7.4 h1
  text "F0" at 26.5,7.4 h1
  text "F1" at 30.3,7.4 h1
Bottom Solder:
  rectangle: 0,4 2.5,39.5
Mechanical 1:
  the board outline again, w0.254